# Altium PCB RFID_PCB.PcbDoc (part 1 of 2)
Units mm, origin at the board's own origin, x right, y up, seen from the top; angles counter-clockwise.
Board outline 160 x 100 mm, 2 copper layers (Top Layer, Bottom Layer); 207 components, 186 nets, 827 pads, 261 vias.
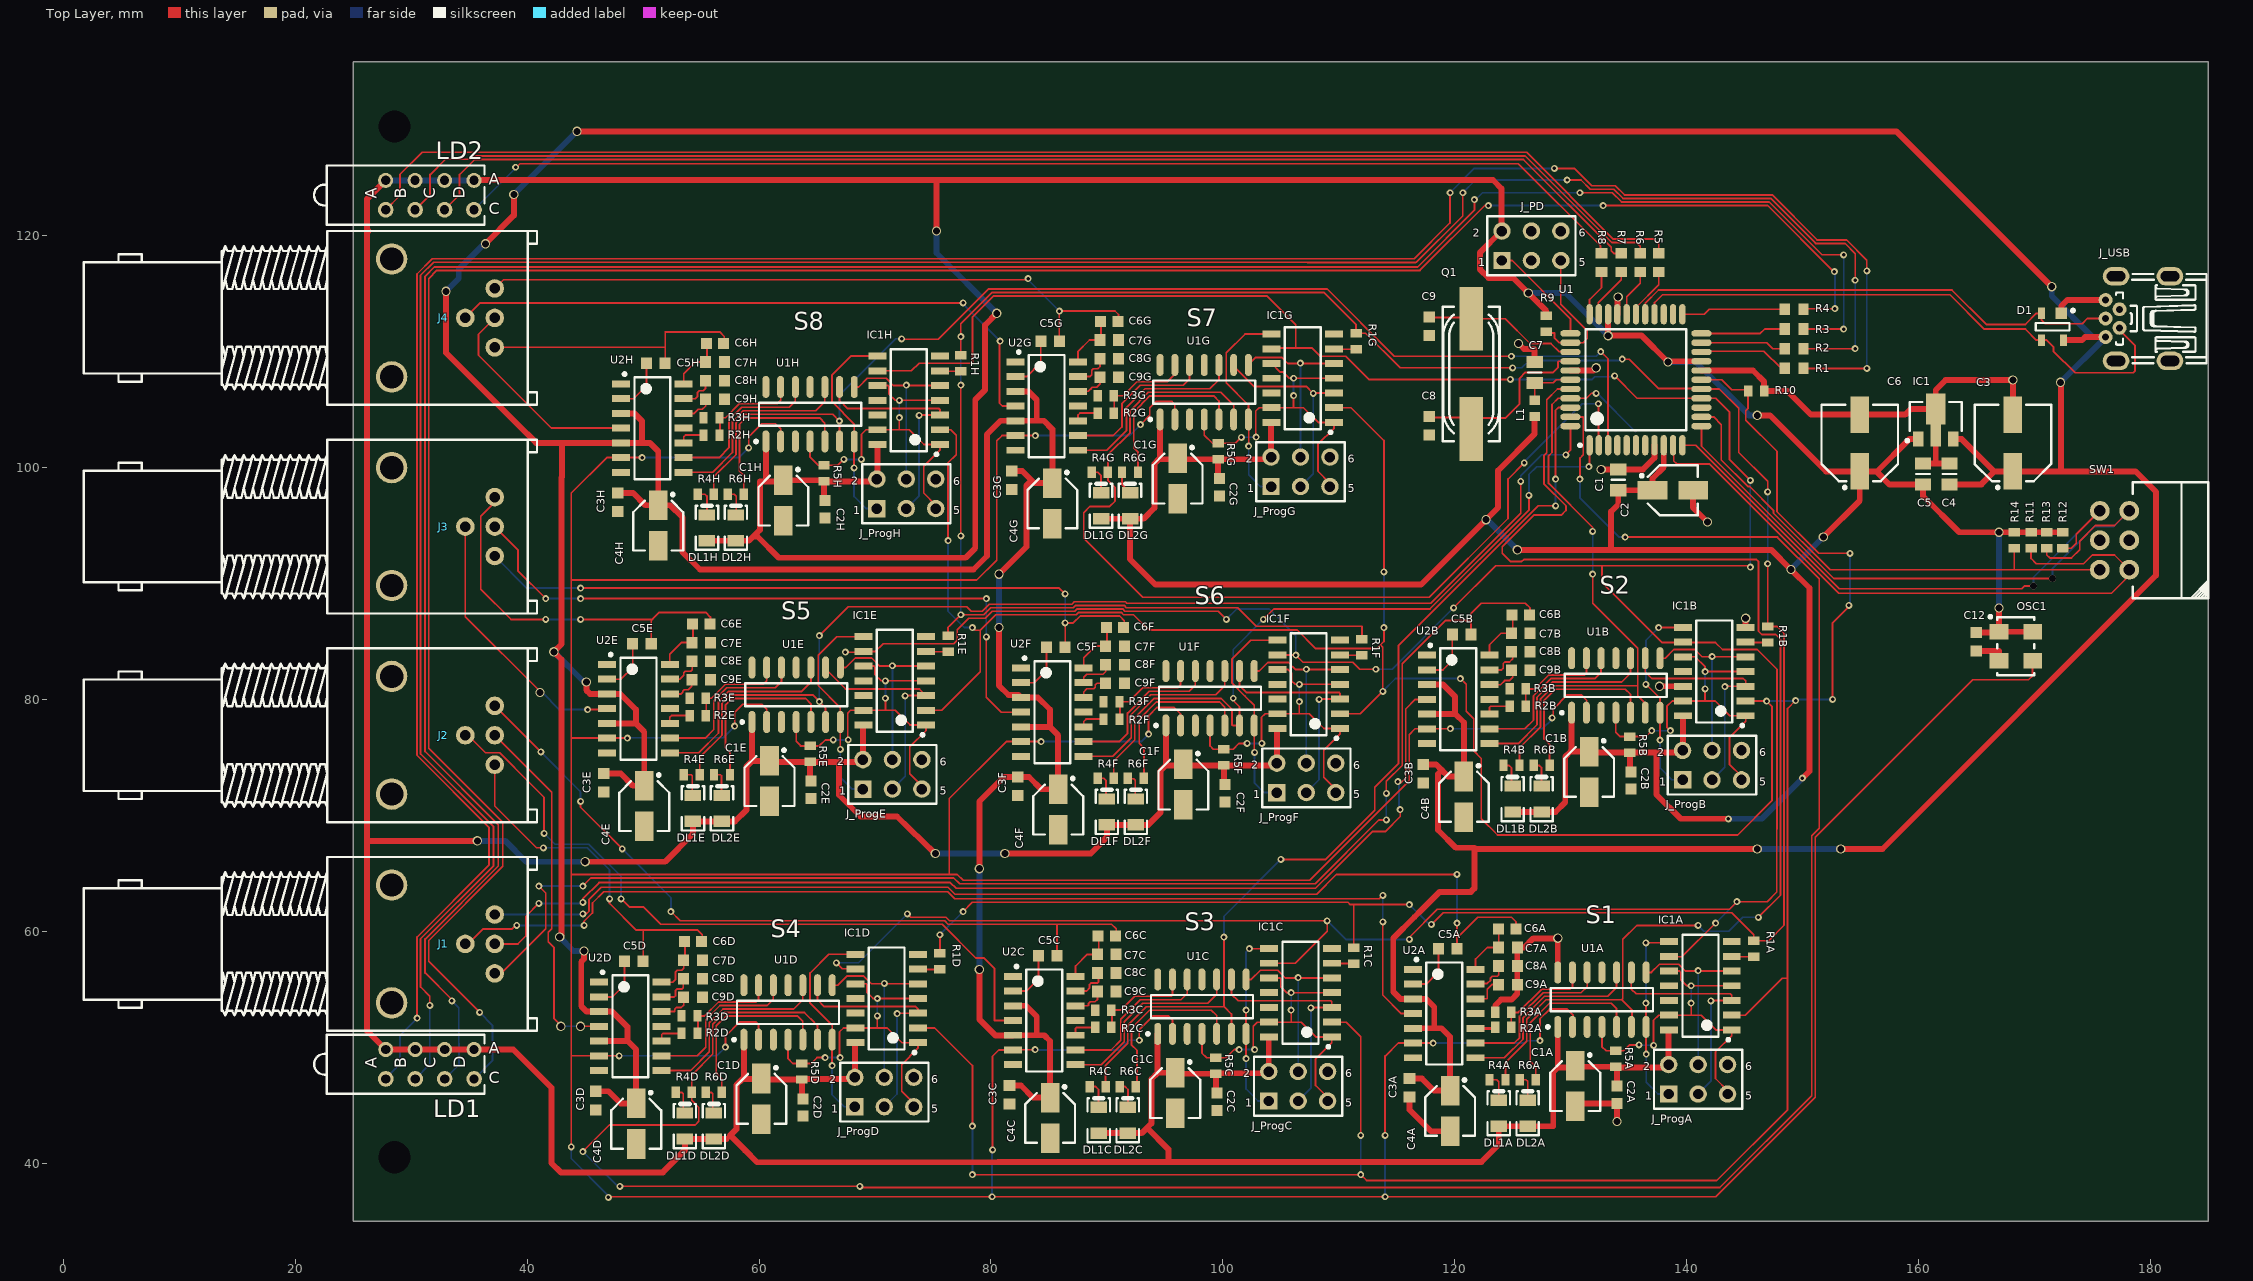
[diagram p0: Top Layer view]
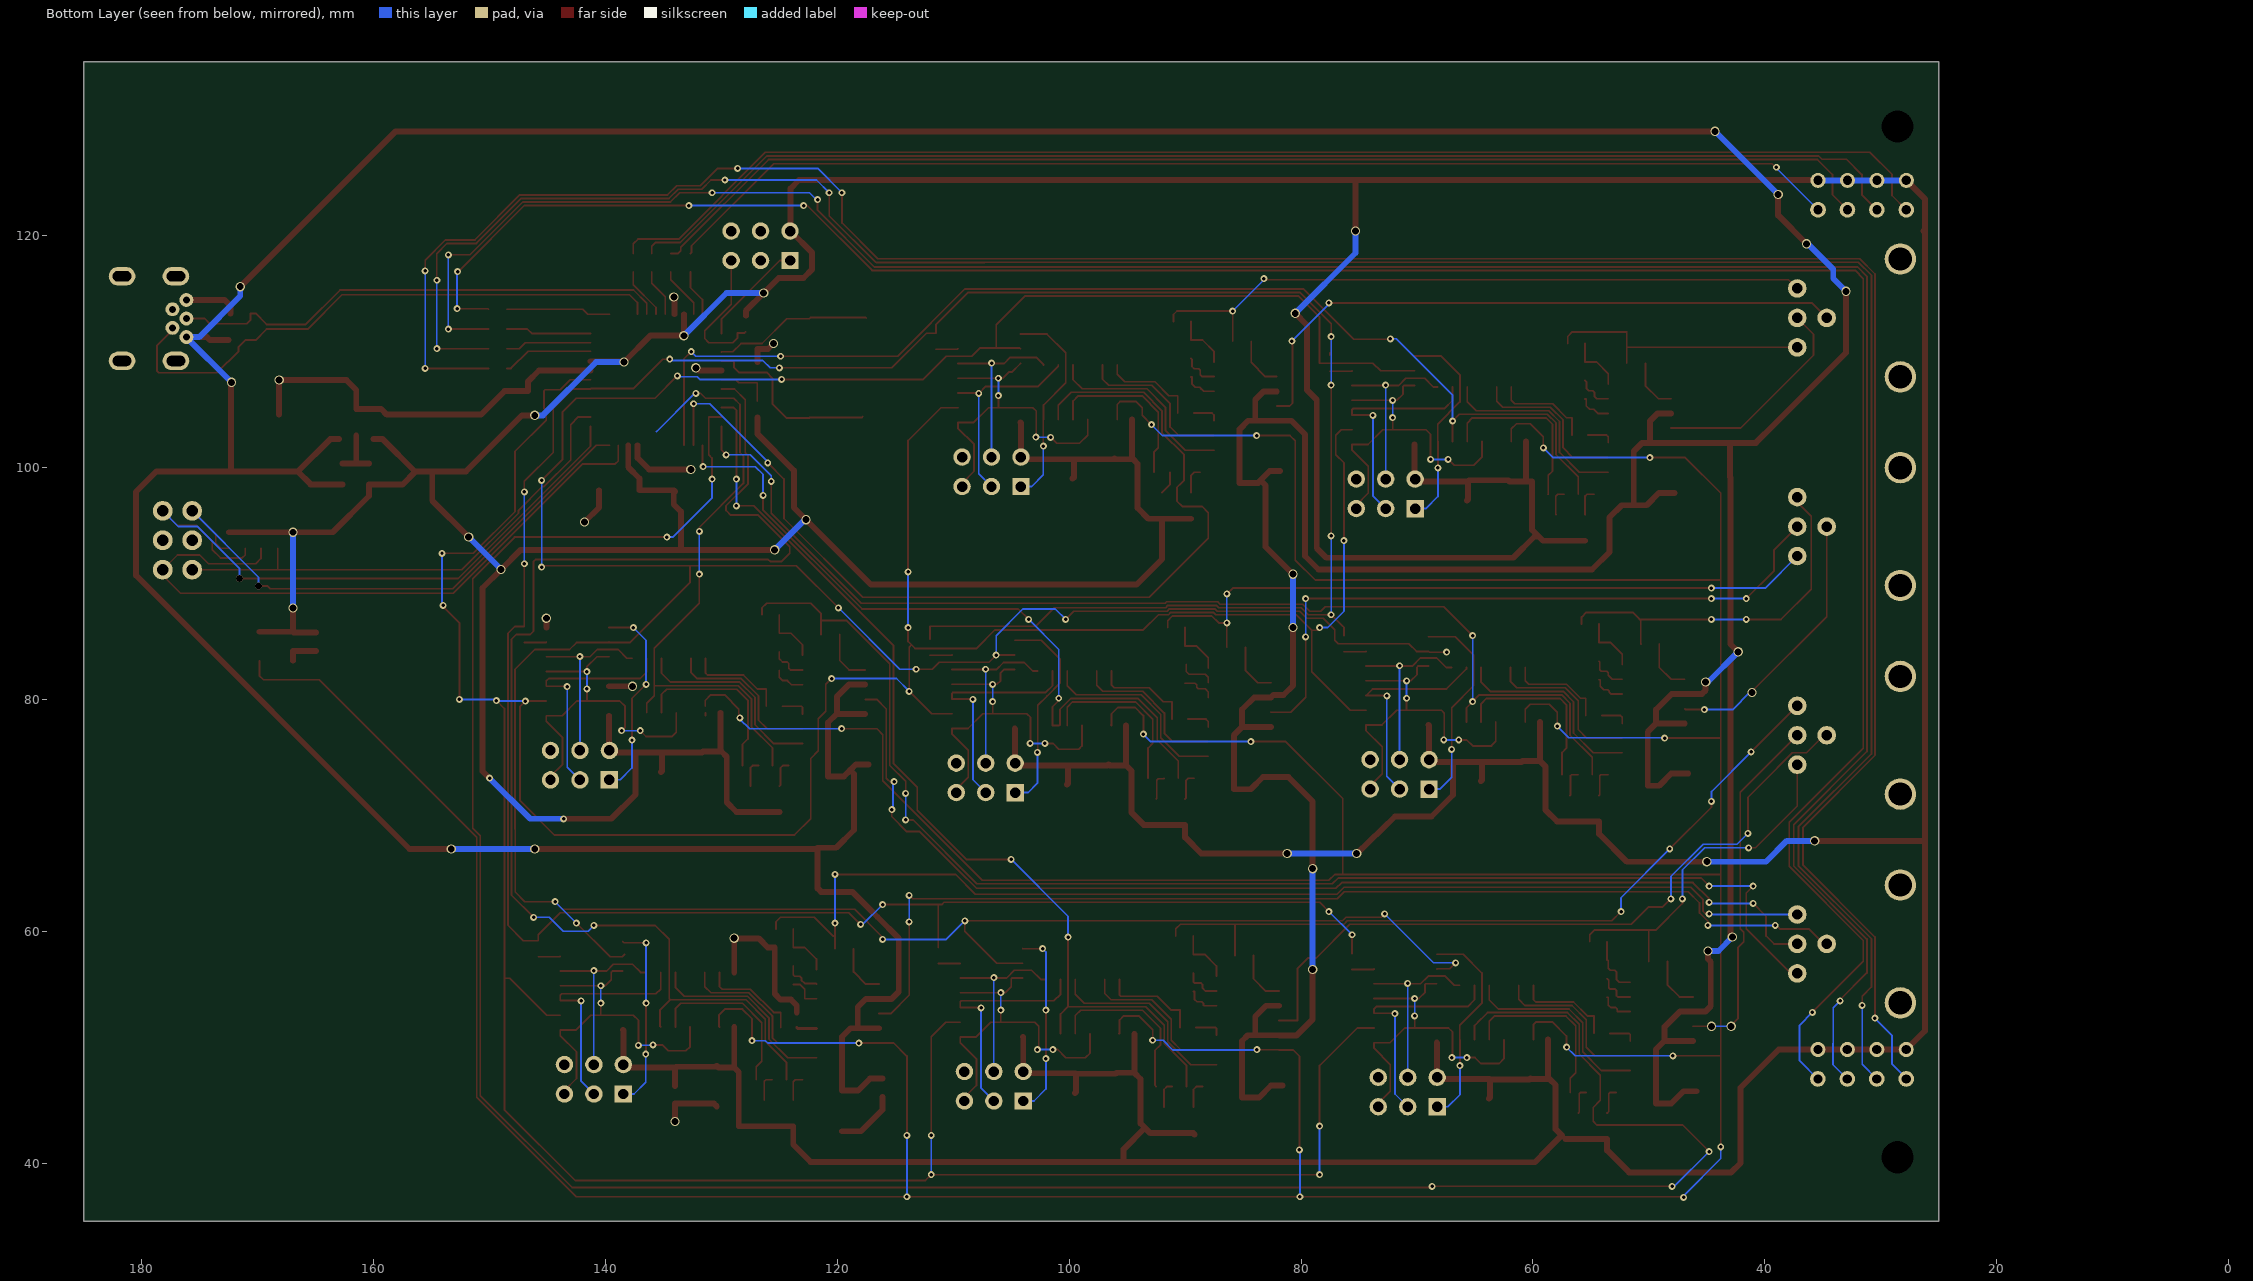
[diagram p1: Bottom Layer view, seen from below]
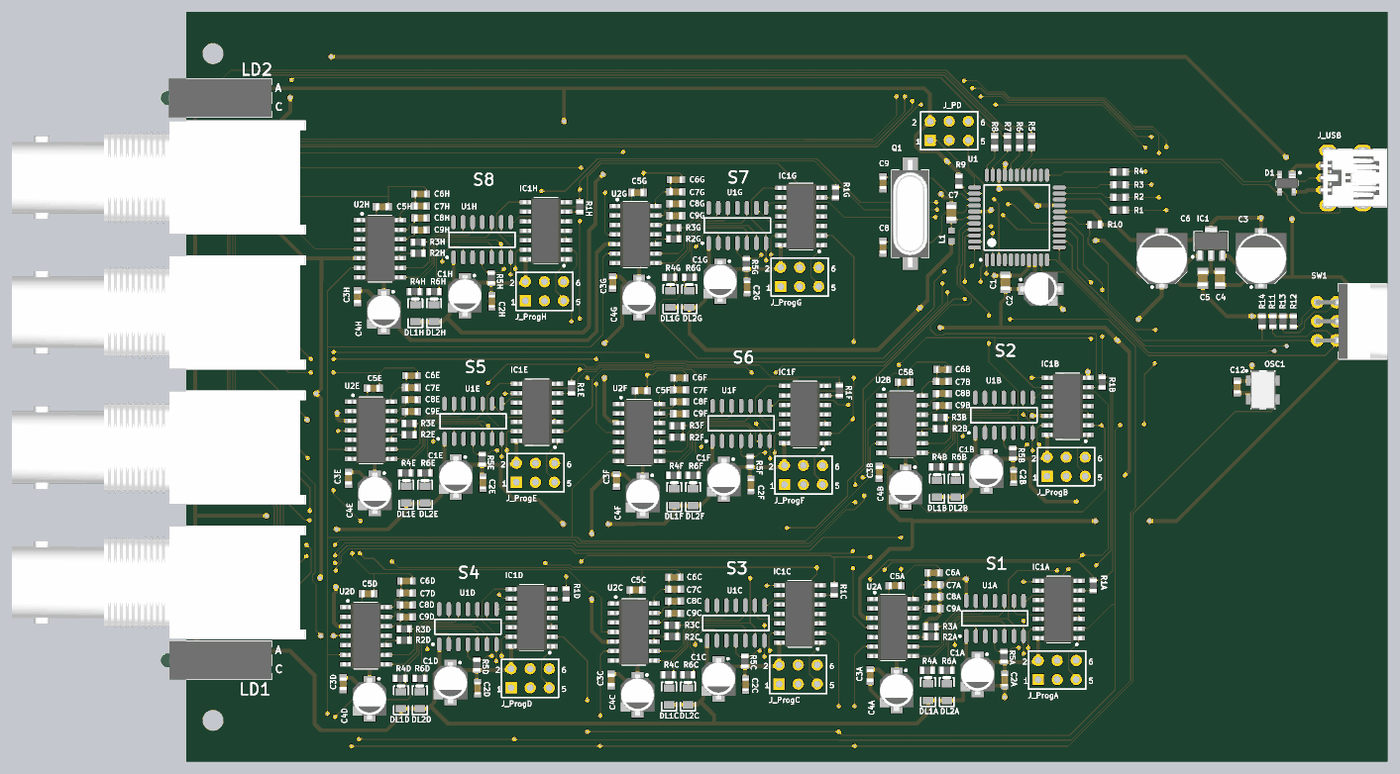
[diagram p3: 3D render of the assembled board from above, using the file's embedded part models]

## Layer stack, top to bottom
Top Solder: solder mask 0.0102, Solder Resist, Dk 3.5
Top Layer: signal copper 0.0356
Dielectric1: dielectric 0.32, FR-4, Dk 4.8
Bottom Layer: signal copper 0.0356
Bottom Solder: solder mask 0.0102, Solder Resist, Dk 3.5

## Board outline
25,35 185,35 185,135 25,135

## Design rules (kind name [scope] priority, off if disabled: settings)
Clearance Clearance_power [(InNet('P3V3') OR InNet('P5V0'))] p1: gap=0.508 ignorepadtopadclearanceinfootprint=FALSE except(0: Arc-Hole Track-Hole SMDPad-Hole THPad-Hole Via-Hole Fill-Hole Poly-Hole Region-Hole Text-Hole)
Clearance [NOT ((InNet('P3V3') OR InNet('P5V0')))] p2: gap=0.152 ignorepadtopadclearanceinfootprint=FALSE except(0: Arc-Hole Track-Hole SMDPad-Hole THPad-Hole Via-Hole Fill-Hole Poly-Hole Region-Hole Text-Hole)
DiffPairsRouting [All] p1: maxlimit=0.254 minlimit=0.254 mostfreqgap=0.254 toplayer_minwidth=0.381 toplayer_maxwidth=0.381 toplayer_prefwidth=0.381 bottomlayer_minwidth=0.381 bottomlayer_maxwidth=0.381 bottomlayer_prefwidth=0.381 maxuncoupledlength=12.7
Height [All] p1: minheight=0 maxheight=50 prefheight=12.7
HoleToHoleClearance [All] p1: gap=0.025 allowstackedmicrovias=TRUE
MinimumSolderMaskSliver [All] p1: minsoldermaskwidth=0
PolygonConnect [All] p1: connectstyle=Relief reliefconductorwidth=0.254 reliefentries=4 polygonreliefangle="90 Angle" airgapwidth=0.254
RoutingVias [All] p1: holewidth=0.3 width=0.6 viastyle="Through Hole" minholewidth=0 minwidth=0 maxholewidth=0.9 maxwidth=0.9
SilkToSilkClearance [All] p1: silktosilkclearance=0
SilkToSolderMaskClearance [IsPad] p1: minsilkscreentomaskgap=0 clearancetoexposedcopper=TRUE
SolderMaskExpansion [All] p1: expansion=0.102
Width Width_power [(InNet('P3V3') OR InNet('P5V0'))] p1: maxlimit=0.508 minlimit=0.508 preferedwidth=0.508
Width [All] p2: maxlimit=0.508 minlimit=0.127 preferedwidth=0.152
24 further rules are at their usual default settings.

## Classes and differential pairs
channel class Slave: S1 S2 S3 S4 S5 S6 S7 S8
component class S1: C1_S1 C2_S1 C3_S1 C4_S1 C5_S1 C7_S1 C8_S1 C9_S1 DL1_S1 DL2_S1 IC1_S1 J_Prog1_S1 R1_S1 R2_S1 R3_S1 R4_S1 R5_S1 R6_S1 U1_S1 U2_S1
component class S4: C1_S4 C2_S4 C3_S4 C4_S4 C5_S4 C6_S4 C7_S4 C8_S4 C9_S4 DL1_S4 DL2_S4 IC1_S4 J_Prog1_S4 R1_S4 R2_S4 R3_S4 R4_S4 R5_S4 R6_S4 U1_S4 U2_S4
component class Master: C12 D1 J2 J3 J? J_PD J_USB L1 LD1 LD2 OSC1 Q1 R7 R8 R9 R10 R11 R12 R13 R14 SW1
net class SS_BUS[1..8]: SS_BUS1 SS_BUS2 SS_BUS3 SS_BUS4 SS_BUS5 SS_BUS6 SS_BUS7 SS_BUS8
net class IN_N[1..8]: IN_N1 IN_N2 IN_N3 IN_N4 IN_N5 IN_N6 IN_N7 IN_N8
net class IN_P[1..8]: IN_P1 IN_P2 IN_P3 IN_P4 IN_P5 IN_P6 IN_P7 IN_P8
differential pair D: +D_P -D_N

## Components (designator, comment, footprint, x,y, rotation, side; value= is the part's Value field where it differs from the comment)
C1 "100nF" CAPC2012X135N 134.112,98.933 r270 top
C1A "22uF" CAPAE430X540N 130.4,46.65 r270 top (schematic designator C1)
C1B "22uF" CAPAE430X540N 131.6,73.75 r270 top (schematic designator C1)
C1C "22uF" CAPAE430X540N 95.9,46.05 r270 top (schematic designator C1)
C1D "22uF" CAPAE430X540N 60.2,45.55 r270 top (schematic designator C1)
C1E "22uF" CAPAE430X540N 60.9,72.95 r270 top (schematic designator C1)
C1F "22uF" CAPAE430X540N 96.6,72.65 r270 top (schematic designator C1)
C1G "22uF" CAPAE430X540N 96.1,99.05 r270 top (schematic designator C1)
C1H "22uF" CAPAE430X540N 62.1,97.15 r270 top (schematic designator C1)
C2 "22uF" CAPAE430X540N 138.811,98.044 r0 top
C2A "100nF" CAPC1608X90N 134,45.9 r90 top (schematic designator C2)
C2B "100nF" CAPC1608X90N 135.2,73 r90 top (schematic designator C2)
C2C "100nF" CAPC1608X90N 99.5,45.3 r90 top (schematic designator C2)
C2D "100nF" CAPC1608X90N 63.8,44.8 r90 top (schematic designator C2)
C2E "100nF" CAPC1608X90N 64.5,72.2 r90 top (schematic designator C2)
C2F "100nF" CAPC1608X90N 100.2,71.9 r90 top (schematic designator C2)
C2G "100nF" CAPC1608X90N 99.7,98.3 r90 top (schematic designator C2)
C2H "100nF" CAPC1608X90N 65.7,96.4 r90 top (schematic designator C2)
C3 "100uF" CAPAE660X540N 168.148,102.108 r90 top
C3A "100nF" CAPC1608X87N 116.1,46.5 r90 top (schematic designator C3)
C3B "100nF" CAPC1608X87N 117.3,73.6 r90 top (schematic designator C3)
C3C "100nF" CAPC1608X87N 81.6,45.9 r90 top (schematic designator C3)
C3D "100nF" CAPC1608X87N 45.9,45.4 r90 top (schematic designator C3)
C3E "100nF" CAPC1608X87N 46.6,72.8 r90 top (schematic designator C3)
C3F "100nF" CAPC1608X87N 82.3,72.5 r90 top (schematic designator C3)
C3G "100nF" CAPC1608X87N 81.8,98.9 r90 top (schematic designator C3)
C3H "100nF" CAPC1608X87N 47.8,97 r90 top (schematic designator C3)
C4 "330nF" CAPC2012X135N 162.687,99.441 r90 top
C4A "22uF" CAPAE430X540N 119.6,44.5 r270 top (schematic designator C4)
C4B "22uF" CAPAE430X540N 120.8,71.6 r270 top (schematic designator C4)
C4C "22uF" CAPAE430X540N 85.1,43.9 r270 top (schematic designator C4)
C4D "22uF" CAPAE430X540N 49.4,43.4 r270 top (schematic designator C4)
C4E "22uF" CAPAE430X540N 50.1,70.8 r270 top (schematic designator C4)
C4F "22uF" CAPAE430X540N 85.8,70.5 r270 top (schematic designator C4)
C4G "22uF" CAPAE430X540N 85.3,96.9 r270 top (schematic designator C4)
C4H "22uF" CAPAE430X540N 51.3,95 r270 top (schematic designator C4)
C5 "100nF" CAPC2012X135N 160.401,99.441 r90 top
C5A "10nF" CAPC1608X87N 119.4,58.5 r180 top (schematic designator C5)
C5B "10nF" CAPC1608X87N 120.6,85.6 r180 top (schematic designator C5)
C5C "10nF" CAPC1608X87N 84.9,57.9 r180 top (schematic designator C5)
C5D "10nF" CAPC1608X87N 49.2,57.4 r180 top (schematic designator C5)
C5E "10nF" CAPC1608X87N 49.9,84.8 r180 top (schematic designator C5)
C5F "10nF" CAPC1608X87N 85.6,84.5 r180 top (schematic designator C5)
C5G "10nF" CAPC1608X87N 85.1,110.9 r180 top (schematic designator C5)
C5H "10nF" CAPC1608X87N 51.1,109 r180 top (schematic designator C5)
C6 "100uF" CAPAE660X540N 154.94,102.108 r90 top
C6A "100pF" CAPC1608X90N 124.55,60.2 r0 top (schematic designator C6)
C6B "100pF" CAPC1608X90N 125.7,87.3 r0 top (schematic designator C6)
C6C "100pF" CAPC1608X90N 90,59.6 r0 top (schematic designator C6)
C6D "100pF" CAPC1608X90N 54.3,59.1 r0 top (schematic designator C6)
C6E "100pF" CAPC1608X90N 55,86.5 r0 top (schematic designator C6)
C6F "100pF" CAPC1608X90N 90.7,86.2 r0 top (schematic designator C6)
C6G "100pF" CAPC1608X90N 90.2,112.6 r0 top (schematic designator C6)
C6H "100pF" CAPC1608X90N 56.2,110.7 r0 top (schematic designator C6)
C7 "100nF" CAPC2012X135N 126.9,108.204 r270 top
C7A "1nF" CAPC1608X87N 124.6,58.6 r180 top (schematic designator C7)
C7B "1nF" CAPC1608X87N 125.7,85.7 r180 top (schematic designator C7)
C7C "1nF" CAPC1608X87N 90,58 r180 top (schematic designator C7)
C7D "1nF" CAPC1608X87N 54.3,57.5 r180 top (schematic designator C7)
C7E "1nF" CAPC1608X87N 55,84.9 r180 top (schematic designator C7)
C7F "1nF" CAPC1608X87N 90.7,84.6 r180 top (schematic designator C7)
C7G "1nF" CAPC1608X87N 90.2,111 r180 top (schematic designator C7)
C7H "1nF" CAPC1608X87N 56.2,109.1 r180 top (schematic designator C7)
C8 "10pF" CAPC1608X87N 117.8,103.6 r90 top
C8A "100nF" CAPC1608X87N 124.6,57 r180 top (schematic designator C8)
C8B "100nF" CAPC1608X87N 125.7,84.1 r180 top (schematic designator C8)
C8C "100nF" CAPC1608X87N 90,56.4 r180 top (schematic designator C8)
C8D "100nF" CAPC1608X87N 54.3,55.9 r180 top (schematic designator C8)
C8E "100nF" CAPC1608X87N 55,83.3 r180 top (schematic designator C8)
C8F "100nF" CAPC1608X87N 90.7,83 r180 top (schematic designator C8)
C8G "100nF" CAPC1608X87N 90.2,109.4 r180 top (schematic designator C8)
C8H "100nF" CAPC1608X87N 56.2,107.5 r180 top (schematic designator C8)
C9 "10pF" CAPC1608X87N 117.8,112.2 r90 top
C9A "100nF" CAPC1608X87N 124.6,55.4 r180 top (schematic designator C9)
C9B "100nF" CAPC1608X87N 125.7,82.5 r180 top (schematic designator C9)
C9C "100nF" CAPC1608X87N 90,54.8 r180 top (schematic designator C9)
C9D "100nF" CAPC1608X87N 54.3,54.3 r180 top (schematic designator C9)
C9E "100nF" CAPC1608X87N 55,81.7 r180 top (schematic designator C9)
C9F "100nF" CAPC1608X87N 90.7,81.4 r180 top (schematic designator C9)
C9G "100nF" CAPC1608X87N 90.2,107.8 r180 top (schematic designator C9)
C9H "100nF" CAPC1608X87N 56.2,105.9 r180 top (schematic designator C9)
C12 "10pF" CAPC1608X87N 164.973,84.963 r90 top
D1 "PRTR5V0U2X" SOT190P230X110-4N 171.577,112.141 r270 top
DL1A "" 0805_LED 123.8,44.3 r270 top (schematic designator DL1)
DL1B "" 0805_LED 125,71.4 r270 top (schematic designator DL1)
DL1C "" 0805_LED 89.3,43.7 r270 top (schematic designator DL1)
DL1D "" 0805_LED 53.6,43.2 r270 top (schematic designator DL1)
DL1E "" 0805_LED 54.3,70.6 r270 top (schematic designator DL1)
DL1F "" 0805_LED 90,70.3 r270 top (schematic designator DL1)
DL1G "" 0805_LED 89.5,96.7 r270 top (schematic designator DL1)
DL1H "" 0805_LED 55.5,94.8 r270 top (schematic designator DL1)
DL2A "" 0805_LED 126.3,44.3 r270 top (schematic designator DL2)
DL2B "" 0805_LED 127.5,71.4 r270 top (schematic designator DL2)
DL2C "" 0805_LED 91.8,43.7 r270 top (schematic designator DL2)
DL2D "" 0805_LED 56.1,43.2 r270 top (schematic designator DL2)
DL2E "" 0805_LED 56.8,70.6 r270 top (schematic designator DL2)
DL2F "" 0805_LED 92.5,70.3 r270 top (schematic designator DL2)
DL2G "" 0805_LED 92,96.7 r270 top (schematic designator DL2)
DL2H "" 0805_LED 58,94.8 r270 top (schematic designator DL2)
IC1 "L78L33ACUTR" SOT89 161.494,104.416 r90 top
IC1A "74LVC126A" SOIC127P600X175-14N 141.2,55.3 r180 top (schematic designator IC1)
IC1B "74LVC126A" SOIC127P600X175-14N 142.4,82.4 r180 top (schematic designator IC1)
IC1C "74LVC126A" SOIC127P600X175-14N 106.7,54.7 r180 top (schematic designator IC1)
IC1D "74LVC126A" SOIC127P600X175-14N 71,54.2 r180 top (schematic designator IC1)
IC1E "74LVC126A" SOIC127P600X175-14N 71.7,81.6 r180 top (schematic designator IC1)
IC1F "74LVC126A" SOIC127P600X175-14N 107.4,81.3 r180 top (schematic designator IC1)
IC1G "74LVC126A" SOIC127P600X175-14N 106.9,107.7 r180 top (schematic designator IC1)
IC1H "74LVC126A" SOIC127P600X175-14N 72.9,105.8 r180 top (schematic designator IC1)
J1 "Family" RENHOTEC_RHT-610-0049 31,58.906 r180 top
J2 "Family" RENHOTEC_RHT-610-0049 31,76.906 r180 top
J3 "Family" RENHOTEC_RHT-610-0049 31,94.906 r180 top
J4 "Family" RENHOTEC_RHT-610-0049 31,112.906 r180 top
J_PD "" HDR2X3 124.079,117.856 r0 top
J_ProgA "" HDR2X3 138.46,45.96 r0 top (schematic designator J_Prog1)
J_ProgB "" HDR2X3 139.66,73.06 r0 top (schematic designator J_Prog1)
J_ProgC "" HDR2X3 103.96,45.36 r0 top (schematic designator J_Prog1)
J_ProgD "" HDR2X3 68.26,44.86 r0 top (schematic designator J_Prog1)
J_ProgE "" HDR2X3 68.961,72.263 r0 top (schematic designator J_Prog1)
J_ProgF "" HDR2X3 104.66,71.96 r0 top (schematic designator J_Prog1)
J_ProgG "" HDR2X3 104.16,98.36 r0 top (schematic designator J_Prog1)
J_ProgH "" HDR2X3 70.16,96.46 r0 top (schematic designator J_Prog1)
J_USB "USB" WURTH_651005136521 176.15,112.85 r90 top
L1 "0.5R" 1608[0603] 126.9,105.1 r270 top
LD1 "Green" LED_BIVAR_H485CGDL 31.61,48.53 r0 top
LD2 "Green" LED_BIVAR_H485CGDL 31.6,123.5 r0 top
OSC1 "Value" OSCSC250P320X500X130-4N 168.402,84.582 r0 top
Q1 "16MHz" XTAL1160X490X430 121.428,108.077 r90 top
R1 "510" RESC1608X55N 149.289,108.547 r180 top
R1A "100" RESC1608X50N 145.8,58.5 r270 top (schematic designator R1)
R1B "100" RESC1608X50N 147,85.6 r270 top (schematic designator R1)
R1C "100" RESC1608X50N 111.3,57.9 r270 top (schematic designator R1)
R1D "100" RESC1608X50N 75.6,57.4 r270 top (schematic designator R1)
R1E "100" RESC1608X50N 76.3,84.8 r270 top (schematic designator R1)
R1F "100" RESC1608X50N 112,84.5 r270 top (schematic designator R1)
R1G "100" RESC1608X50N 111.5,110.9 r270 top (schematic designator R1)
R1H "100" RESC1608X50N 77.4,109 r270 top (schematic designator R1)
R2 "510" RESC1608X55N 149.289,110.247 r180 top
R2A "10k" RESC1608X50N 124.19,51.7 r0 top (schematic designator R2)
R2B "10k" RESC1608X50N 125.45,79.4 r0 top (schematic designator R2)
R2C "10k" RESC1608X50N 89.7,51.7 r0 top (schematic designator R2)
R2D "10k" RESC1608X50N 54,51.2 r0 top (schematic designator R2)
R2E "10k" RESC1608X50N 54.7,78.6 r0 top (schematic designator R2)
R2F "10k" RESC1608X50N 90.4,78.3 r0 top (schematic designator R2)
R2G "10k" RESC1608X50N 89.9,104.7 r0 top (schematic designator R2)
R2H "10k" RESC1608X50N 55.9,102.8 r0 top (schematic designator R2)
R3 "510" RESC1608X55N 149.289,111.947 r180 top
R3A "15k" RESC1608X50N 124.19,53 r180 top (schematic designator R3)
R3B "15k" RESC1608X50N 125.45,80.9 r180 top (schematic designator R3)
R3C "15k" RESC1608X50N 89.7,53.2 r180 top (schematic designator R3)
R3D "15k" RESC1608X50N 54,52.7 r180 top (schematic designator R3)
R3E "15k" RESC1608X50N 54.7,80.1 r180 top (schematic designator R3)
R3F "15k" RESC1608X50N 90.4,79.8 r180 top (schematic designator R3)
R3G "15k" RESC1608X50N 89.9,106.2 r180 top (schematic designator R3)
R3H "15k" RESC1608X50N 55.9,104.3 r180 top (schematic designator R3)
R4 "510" RESC1608X55N 149.289,113.647 r180 top
R4A "1k" RESC1608X50N 123.7,47.2 r180 top (schematic designator R4)
R4B "1k" RESC1608X50N 124.9,74.3 r180 top (schematic designator R4)
R4C "1k" RESC1608X50N 89.2,46.6 r180 top (schematic designator R4)
R4D "1k" RESC1608X50N 53.5,46.1 r180 top (schematic designator R4)
R4E "1k" RESC1608X50N 54.2,73.5 r180 top (schematic designator R4)
R4F "1k" RESC1608X50N 89.9,73.2 r180 top (schematic designator R4)
R4G "1k" RESC1608X50N 89.4,99.6 r180 top (schematic designator R4)
R4H "1k" RESC1608X50N 55.4,97.7 r180 top (schematic designator R4)
R5 "510" RESC1608X55N 137.6,117.666 r270 top
R5A "10k" RESC1608X50N 133.9,49 r270 top (schematic designator R5)
R5B "10k" RESC1608X50N 135.1,76.1 r270 top (schematic designator R5)
R5C "10k" RESC1608X50N 99.4,48.4 r270 top (schematic designator R5)
R5D "10k" RESC1608X50N 63.7,47.9 r270 top (schematic designator R5)
R5E "10k" RESC1608X50N 64.4,75.3 r270 top (schematic designator R5)
R5F "10k" RESC1608X50N 100.1,75 r270 top (schematic designator R5)
R5G "10k" RESC1608X50N 99.6,101.4 r270 top (schematic designator R5)
R5H "10k" RESC1608X50N 65.6,99.5 r270 top (schematic designator R5)
R6 "510" RESC1608X55N 136,117.666 r270 top
R6A "1k" RESC1608X50N 126.3,47.2 r180 top (schematic designator R6)
R6B "1k" RESC1608X50N 127.5,74.3 r180 top (schematic designator R6)
R6C "1k" RESC1608X50N 91.8,46.6 r180 top (schematic designator R6)
R6D "1k" RESC1608X50N 56.1,46.1 r180 top (schematic designator R6)
R6E "1k" RESC1608X50N 56.8,73.5 r180 top (schematic designator R6)
R6F "1k" RESC1608X50N 92.5,73.2 r180 top (schematic designator R6)
R6G "1k" RESC1608X50N 92,99.6 r180 top (schematic designator R6)
R6H "1k" RESC1608X50N 58,97.7 r180 top (schematic designator R6)
R7 "510" RESC1608X55N 134.364,117.666 r270 top
R8 "510" RESC1608X55N 132.664,117.666 r270 top
R9 "10k" RESC1608X50N 127.9,112.4 r90 top
R10 "10k" RESC1608X50N 146,106.6 r180 top
R11 "10k" RESC1608X50N 169.714,93.726 r90 top
R12 "10k" RESC1608X50N 172.466,93.726 r90 top
R13 "10k" RESC1608X50N 171.069,93.726 r90 top
R14 "10k" RESC1608X50N 168.275,93.726 r90 top
SW1 "HEX" SW_APEM_PT65106L254 181.737,93.726 r180 top
U1 "ATxmega16A4U-AU" 44A_N 135.636,107.569 r90 top
U1A "" 14S1_L 132.7,54.1 r90 top (schematic designator U1)
U1B "" 14S1_L 133.9,81.2 r90 top (schematic designator U1)
U1C "" 14S1_L 98.2,53.5 r90 top (schematic designator U1)
U1D "" 14S1_L 62.5,53 r90 top (schematic designator U1)
U1E "" 14S1_L 63.2,80.4 r90 top (schematic designator U1)
U1F "" 14S1_L 98.9,80.1 r90 top (schematic designator U1)
U1G "" 14S1_L 98.4,106.5 r90 top (schematic designator U1)
U1H "" 14S1_L 64.4,104.6 r90 top (schematic designator U1)
U2A "HTRC110" SOIC127P600X175-14N 119.1,52.9 r0 top (schematic designator U2)
U2B "HTRC110" SOIC127P600X175-14N 120.3,80 r0 top (schematic designator U2)
U2C "HTRC110" SOIC127P600X175-14N 84.6,52.3 r0 top (schematic designator U2)
U2D "HTRC110" SOIC127P600X175-14N 48.9,51.8 r0 top (schematic designator U2)
U2E "HTRC110" SOIC127P600X175-14N 49.6,79.2 r0 top (schematic designator U2)
U2F "HTRC110" SOIC127P600X175-14N 85.3,78.9 r0 top (schematic designator U2)
U2G "HTRC110" SOIC127P600X175-14N 84.8,105.3 r0 top (schematic designator U2)
U2H "HTRC110" SOIC127P600X175-14N 50.8,103.4 r0 top (schematic designator U2)

## Footprints (in the part's own frame and the unit in brackets; to place one, negate y for a bottom-side part, rotate by r counter-clockwise, add the part's x,y. Pads: shape width x height; smd on the part's side, far side on the other; paste and mask are expansions set on the pad)
14S1_L [mm] "SOIC, 14-Leads, Body 8.7x3.9mm, Pitch 1.27mm, IPC High Density"
  oval 1.9x0.6 smd: 1(-2.35,3.81) 2(-2.35,2.54) 3(-2.35,1.27) 4(-2.35,0) 5(-2.35,-1.27) 6(-2.35,-2.54) 7(-2.35,-3.81) 8(2.35,-3.81) 9(2.35,-2.54) 10(2.35,-1.27) 11(2.35,0) 12(2.35,1.27) 13(2.35,2.54) 14(2.35,3.81)
  silkscreen extent -2.47,-4.4 1,4.78, body extent -2,-4.38 2,4.38, height 1.75
44A_N [mm] "Thin QFP, 44-Leads, Body 10x10mm, Pitch 0.8mm, IPC Medium Density"
  oval 1.75x0.55 smd: 1(-5.65,4) 2(-5.65,3.2) 3(-5.65,2.4) 4(-5.65,1.6) 5(-5.65,0.8) 6(-5.65,0) 7(-5.65,-0.8) 8(-5.65,-1.6) 9(-5.65,-2.4) 10(-5.65,-3.2) 11(-5.65,-4) 23(5.65,-4) 24(5.65,-3.2) 25(5.65,-2.4) 26(5.65,-1.6) 27(5.65,-0.8) 28(5.65,0) 29(5.65,0.8) 30(5.65,1.6) 31(5.65,2.4) 32(5.65,3.2) 33(5.65,4)
  oval 0.55x1.75 smd: 12(-4,-5.65) 13(-3.2,-5.65) 14(-2.4,-5.65) 15(-1.6,-5.65) 16(-0.8,-5.65) 17(0,-5.65) 18(0.8,-5.65) 19(1.6,-5.65) 20(2.4,-5.65) 21(3.2,-5.65) 22(4,-5.65) 34(4,5.65) 35(3.2,5.65) 36(2.4,5.65) 37(1.6,5.65) 38(0.8,5.65) 39(0,5.65) 40(-0.8,5.65) 41(-1.6,5.65) 42(-2.4,5.65) 43(-3.2,5.65) 44(-4,5.65)
  silkscreen extent -5.77,-4.35 4.35,4.95, body extent -5,-5 5,5, height 1.2
0805_LED [mm]
  rect 0.965x1.422 smd: A(1.118,0) K(-1.118,0)
  silkscreen extent -1.91,-0.97 1.91,0.97, body extent -1,-0.63 1,0.63, height 0.9
1608[0603] [mm] "Chip Capacitor, Body 1.6x0.8mm, IPC High Density"
  rect 0.8x0.9 smd: 1(-0.7,0) 2(0.7,0)
  body extent -0.87,-0.48 0.87,0.48, height 1.3
CAPAE430X540N [mm] "Capacitor, Aluminium Electrolytric, 4.3mm L X 4.3mm W X 5.4mm H, IPC Medium Density"
  rect 2.55x1.6 smd: 1(-1.75,0) 2(1.75,0)
  silkscreen extent -2.8,-2.15 2.15,2.15, body extent -2.75,-2.25 2.75,2.25, height 5.7
CAPAE660X540N [mm] "Capacitor, Aluminium Electrolytric, 6.6mm L X 6.6mm W X 5.4mm H, IPC Medium Density"
  rect 3.15x1.6 smd: 1(-2.45,0) 2(2.45,0)
  silkscreen extent -3.95,-3.3 3.3,3.3, body extent -3.9,-3.4 3.9,3.4, height 5.7
CAPC1608X87N [mm] "Chip Capacitor, Body 1.6x0.8mm IPC Medium Density"
  rect 0.95x1 smd: 1(-0.8,0) 2(0.8,0)
  body extent -0.87,-0.47 0.88,0.48, height 0.87
CAPC1608X90N [mm] "Chip Capacitor, Body 1.6x0.8mm IPC Medium Density"
  rect 0.95x0.95 smd: 1(-0.75,0) 2(0.75,0)
  body extent -0.85,-0.45 0.85,0.45, height 0.9
CAPC2012X135N [mm] "Chip Capacitor, Body 2.0x1.25mm, IPC Medium Density"
  rect 1.05x1.4 smd: 1(-0.9,0) 2(0.9,0)
  silkscreen extent 0,-0.58 0,0.58, body extent -1.05,-0.67 1.05,0.68, height 1.25
HDR2X3 [mm] "Connector; Header; 3x2 Position"
  rect 1.5x1.5 hole 0.9: 1(0,0)
  round 1.5 hole 0.9: 2(0,2.54) 3(2.54,0) 4(2.54,2.54) 5(5.08,0) 6(5.08,2.54)
  silkscreen extent -1.27,-1.27 6.35,3.81
LED_BIVAR_H485CGDL [mm] "Quad-Level 2mm Green, PCB Edge Mounting  BIVAR H485CGDL"
  round 1.35 hole 0.8: 1(-3.81,-1.27) 3(-1.27,-1.27) 5(1.27,-1.27) 7(3.81,-1.27)
  round 1.3 hole 0.8: 2(-3.81,1.27) 4(-1.27,1.27) 6(1.27,1.27) 8(3.81,1.27)
  silkscreen extent -9.99,-2.55 4.71,2.55, body extent -9.99,-2.55 4.71,2.55, height 11.3
OSCSC250P320X500X130-4N [mm] "Oscillator, Side Concave; 2.54mm Pitch; 4 pin, 3.20mm L X 5.00mm W X 1.30mm H, IPC Medium Density"
  rect 1.6x1.35 smd: 1(-1.45,1.25) 2(-1.45,-1.25) 3(1.45,-1.25) 4(1.45,1.25)
  silkscreen extent -2.32,-2.5 1.6,2.67, body extent -1.7,-2.6 1.7,2.6, height 1.3
RENHOTEC_RHT-610-0049 [mm] "Dual Right Angle 50 Ohm BNC Jack, White Valox Case"
  round 1.6 hole 0.9: 1(-6.2,-2.54) 2(-6.2,0) 3(-6.2,2.54) 4(-3.66,0)
  round 2.7 hole 2: 6(2.69,-5.08) 7(2.69,5.08)
  silkscreen extent -9.85,-7.5 29.25,7.5, body extent -9.85,-7.5 29.25,7.5, height 29.3
RESC1608X50N [mm] "Chip Resistor, EIA 0603, Metric 1608, Body 1.6x0.8mm, IPC Medium Density"
  rect 0.72x0.99 smd: 1(-0.69,0) 2(0.69,0)
  body extent -0.87,-0.47 0.88,0.48, height 0.5
RESC1608X55N [mm] "Chip Resistor, EIA 0603, Metric 1608, Body 1.6x0.8mm, IPC Medium Density"
  rect 0.9x1 smd: 1(-0.8,0) 2(0.8,0)
  body extent -0.87,-0.47 0.88,0.48, height 0.55
SOIC127P600X175-14N [mm] "SOIC 14, Pitch 1.27mm - Body 4x8.75mm, IPC Medium Density"
  rect 1.55x0.6 smd: 1(-2.7,3.81) 2(-2.7,2.54) 3(-2.7,1.27) 4(-2.7,0) 5(-2.7,-1.27) 6(-2.7,-2.54) 7(-2.7,-3.81) 8(2.7,-3.81) 9(2.7,-2.54) 10(2.7,-1.27) 11(2.7,0) 12(2.7,1.27) 13(2.7,2.54) 14(2.7,3.81)
  silkscreen extent -2.53,-4.4 1.55,4.78, body extent -3.1,-4.37 3.1,4.38, height 1.75
SOT89 [mm] "SOT89-3, 3-Leads, Body 2.48x4.5mm"
  rect 1.3x0.9 smd: 1(-1.965,1.5) 3(-1.965,-1.5)
  rect 1.9x0.9 smd: 2(-1.665,0)
  rect 2.7x1.7 smd: 2(0.635,0)
  silkscreen extent -2.22,-2.25 1.24,2.57, body extent -2.44,-2.25 1.81,2.25, height 1.6
SOT190P230X110-4N [mm] "SOT143, SOT, 1.90mm Pitch; 4 Pin, 1.30mm W X 2.90mm L X 1.10mm H body, IPC Medium Density"
  rect 1x1 smd: 1(-1.15,0.75)
  rect 1x0.6 smd: 2(-1.15,-0.95) 3(1.15,-0.95) 4(1.15,0.95)
  silkscreen extent -1.52,-1.45 0.33,1.88, body extent -1.25,-1.5 1.25,1.5, height 1.1
SW_APEM_PT65106L254 [mm] "Body 10x10mm, Right Angled Rotary Hexadecimal Code Switch Whith Screwdriver Actuator, APEM PT65 (CR65) Series"
  round 1.7 hole 1: 1(3.55,2.54) 2(6.09,-2.54) 4(3.55,-2.54) 8(6.09,2.54) C1(3.55,0) C2(6.09,0)
  silkscreen extent -3.25,-5 3.25,5, body extent -3.25,-5 6.23,5, height 10
WURTH_651005136521 [mm] "Mini USB Type B Horizontal 5 Contacts"
  round 1.2 hole 0.6: 1(-1.6,0) 2(-0.8,-1.2) 3(0,0) 4(0.8,-1.2) 5(1.6,0)
  oval 1.6x2.3 hole 0.9 slot 1.6 at 90 deg: 6(-3.65,-5.55) 6(-3.65,-0.9) 6(3.65,-5.55) 6(3.65,-0.9)
  silkscreen extent -3.85,-8.7 3.85,-0.9, body extent -4.07,-8.7 4.08,0.13, height 3.9
XTAL1160X490X430 [mm] "HC49/4H SMX Case, SMD Cristal, Body 11.6x4.9mm"
  rect 5.5x2 smd: 1(-4.75,0) 2(4.75,0)
  silkscreen extent -5.8,-2.45 5.8,2.45, body extent -7.15,-2.45 7.15,2.45, height 4.3

## Part data
C1 C5 C7: library part CC0805_100NF_50V_10%_X7R, "Non-polarised capacitor"
C1A C1B C1C C1D C1E C1F C1G C1H C2 C4A C4B C4C C4D C4E C4F C4G C4H: library part CAE430-540_22UF_10V_20%, "Polarised capacitor"
C2A C2B C2C C2D C2E C2F C2G C2H: library part CC0603_100NF_100V_10%_X7R, "Non-polarised capacitor"
C3 C6: library part CAE660-540_100UF_6.3V_20%, "Polarised capacitor"
C3A C3B C3C C3D C3E C3F C3G C3H C5A C5B C5C C5D C5E C5F C5G C5H C7A C7B C7C C7D C7E C7F C7G C7H C8A C8B C8C C8D C8E C8F C8G C8H C9A C9B C9C C9D C9E C9F C9G C9H: library part CC0603_10NF_50V_10%_X7R, "Non-polarised capacitor"
C4: library part CC0805_330NF_16V_10%_X7R, "Non-polarised capacitor"
C6A C6B C6C C6D C6E C6F C6G C6H: library part CC0603_100PF_250V_5%_ATC_600S, "Non-polarised capacitor"
C8 C9 C12: library part CC0603_10PF_50V_5%_NP0, "Non-polarised capacitor"
D1: "Ultra Low Capacitance Double Rail-to-Rail ESD Protection Diode"
DL1A DL1B DL1C DL1D DL1E DL1F DL1G DL1H DL2A DL2B DL2C DL2D DL2E DL2F DL2G DL2H: library part LED1, "Light Emitting Diode"
IC1: "3-Terminal Regulator 1=OUT 2=GND 3=IN"
IC1A IC1B IC1C IC1D IC1E IC1F IC1G IC1H: "Quadruple Bus Buffer with 3-State Outputs"
J1 J2 J3 J4: "Dual Right Angle 50 Ohm BNC Jack, White Valox Case"
J_PD J_ProgA J_ProgB J_ProgC J_ProgD J_ProgE J_ProgF J_ProgG J_ProgH: library part "Header 3X2", "Header, 3-Pin, Dual row"
J_USB: library part WURTH_651005136521, "5 Pin + 1 Shield USB Receptacle"
L1: library part IND_1UH_20%_BOURNS_SRP4020TA, "Ferrite Bead"
LD1 LD2: "LED x4 Green 1C2A-BOT_3C4A_5C6A_7C8A-TOP"
OSC1: library part "Oscillator 1E 2GND 3OUT 4VDD", "Oscillator 4 pins 1=E/D 2=GND 3=OUT 4=VDD"
Q1: library part XTAL_16MHZ_IQD_LFXTAL003237, "Quartz Crystal"
R1 R2 R3 R4 R5 R6 R7 R8: library part R0603_510R_1%_0.1W_100PPM, "Resistor - 1%"
R1A R1B R1C R1D R1E R1F R1G R1H: library part R0603_100R_1%_0.1W_100PPM, "Resistor - 1%"
R2A R2B R2C R2D R2E R2F R2G R2H: library part R0603_10K_1%_0.1W_100PPM, "Resistor - 1%"
R3A R3B R3C R3D R3E R3F R3G R3H: library part R0603_15K_1%_0.1W_100PPM, "Resistor - 1%"
R4A R4B R4C R4D R4E R4F R4G R4H R5A R5B R5C R5D R5E R5F R5G R5H R6A R6B R6C R6D R6E R6F R6G R6H R9 R10 R11 R12 R13 R14: library part R0805_1K_1%_0.33W_100PPM_VISHAY_CRCW-HP, "Resistor - 1%"
SW1: library part SW_APEM_PT65106L254, "Rotary Code Switch 1 2 4 8 C1 C2"
U1: library part ATxmega16A4-AU, "8/16-bit AVR XMEGA A4 Microcontroller, 1.6-3.6V, 16KB + 4KB Flash, 1KB EEPROM, 2KB SRAM, 44-pin TQFP, Industrial Grade (-40°C to 85°C), Pb-Free"
U1A U1B U1C U1D U1E U1F U1G U1H: library part ATtiny441-SU, "8-bit AVR Microcontroller, 1.8-5.5V, 2KB Flash, 128 Bytes SRAM, 12 GPIO pins, 14-pin SOIC, Industrial Grade (-40°C to 85°C), Pb-Free"
U2A U2B U2C U2D U2E U2F U2G U2H: "HITAG reader chip"

## Free pads (board coordinates)
  round 1.27 hole 2.794: 1(28.55,129.413) 2(28.556,40.513)

## Via types
v1: diameter 0.6, hole 0.3, Top Layer to Bottom Layer, 214 vias
v2: diameter 0.8, hole 0.6, Top Layer to Bottom Layer, 45 vias
v3: diameter 0.6, hole 0.6, Top Layer to Bottom Layer, 2 vias

## Nets (pads, with @x,y where several pads share a name; then routed paths per layer and width w, separated by ;. In a path a pad name is that pad's centre, name@x,y a point inside that pad or via, vN(x,y) a via of type N, cw(c..) or ccw(c..) an arc to the next point about the centre after c; other vN are vias at no path point)
BV_1: R11.1 SW1.1 U1.10 | length 56.9
  Top Layer w0.152: U1.10@138.895,101.919 138.895,100.563 139.149,100.309 141.96,100.309 153.115,89.154 176.657,89.154 178.187,90.684 SW1.1@178.187,91.186 176.917,92.456 175.006,92.456 174.244,91.694 170.18,91.694 169.714,92.16 R11.1@169.714,93.036
BV_2: R12.1 SW1.2 U1.11 | length 49.5
  Top Layer w0.152: U1.11@139.636,101.919 140.781,101.919 153.165,89.535 168.904,89.535 169.158,89.789 v3(169.926,89.789) 170.053,89.789 v3@170.114,89.85 ; R12.1@172.466,93.036 173.173,93.036 173.609,93.472 173.609,94.228 SW1.2@175.647,96.266
  Bottom Layer w0.152: v3(169.926,89.789) 169.926,90.545 SW1.2@175.647,96.266
BV_3: R13.1 SW1.4 U1.12 | length 56.2
  Top Layer w0.152: U1.12@141.286,103.569 141.286,101.852 152.714,90.424 v3(171.577,90.424) ; R13.1@171.069,93.036 171.069,92.456 171.323,92.202 173.202,92.202 173.914,92.914 173.914,93.65 175.26,94.996 176.917,94.996 SW1.4@178.187,96.266
  Bottom Layer w0.152: v3(171.577,90.424) 171.577,91.313 175.168,94.904 176.825,94.904 SW1.4@178.187,96.266
BV_4: R14.1 SW1.8 U1.13 | length 43.6
  Top Layer w0.152: U1.13@141.286,104.369 142.331,104.369 143,103.7 143,100.652 145.281,98.371 145.429,98.371 147.495,96.305 147.495,96.074 152.383,91.186 168.275,91.186 ; R14.1@168.275,93.036 168.275,91.186 ; SW1.8@175.647,91.186 168.275,91.186
D1: R1.2 U1.20 | length 7.8
  Top Layer w0.152: U1.20@141.286,110.028 146.672,110.028 148.153,108.547 R1.2@148.489,108.547
D2: R2.2 U1.21 | length 7.4
  Top Layer w0.152: U1.21@141.286,110.769 146.914,110.769 147.436,110.247 R2.2@148.489,110.247
D3: R3.2 U1.22 | length 7.4
  Top Layer w0.152: U1.22@141.286,111.569 146.367,111.569 146.745,111.947 R3.2@148.489,111.947
D4: R4.2 U1.23 | length 9
  Top Layer w0.152: U1.23@139.636,113.219 141.54,113.219 141.968,113.647 R4.2@148.489,113.647
D5: R5.2 U1.28 | length 4.5
  Top Layer w0.152: U1.28@135.636,113.219 135.636,113.804 137.6,115.768 R5.2@137.6,116.866
D6: R6.2 U1.29 | length 4.1
  Top Layer w0.152: U1.29@134.836,113.219 134.836,114.736 136,115.9 R6.2@136,116.866
D7: R7.2 U1.32 | length 4.5
  Top Layer w0.152: U1.32@132.377,113.219 132.377,114.216 134.364,116.203 R7.2@134.364,116.866
D8: R8.2 U1.33 | length 4.1
  Top Layer w0.152: U1.33@131.636,113.219 131.636,114.491 132.664,115.519 R8.2@132.664,116.866
D_N: D1.3 J_USB.2 U1.26 | length 50.1
  Top Layer w0.152: U1.26@137.236,113.219 137.236,114.224 137.922,114.91 162.722,114.91 165.694,111.938 169.233,111.938 170.18,110.991 D1.3@170.627,110.991 171.076,110.991 171.643,110.424 171.643,110.043 173.515,108.171 178.529,108.171 178.689,108.331 178.689,110.49 177.35,111.829 J_USB.2@177.35,112.05
D_P: D1.2 J_USB.3 U1.27 | length 43.7
  Top Layer w0.152: U1.27@136.436,113.219 136.436,114.173 137.579,115.316 162.89,115.316 165.862,112.344 169.233,112.344 170.18,113.291 D1.2@170.627,113.291 170.627,112.71 170.942,112.395 174.117,112.395 174.572,112.85 J_USB.3@176.15,112.85
DIN_S1: U1A.12 U2A.9 | length 14
  Top Layer w0.152: U2A.9@121.8,50.36 125.129,50.36 125.6,50.831 125.6,52.695 125.626,52.695 127.626,54.695 130.895,54.695 131.43,55.23 U1A.12@131.43,56.45
DIN_S2: U1B.12 U2B.9 | length 14.1
  Top Layer w0.152: U2B.9@123,77.46 126.06,77.46 126.8,78.2 126.8,80.3 128.295,81.795 132.095,81.795 132.63,82.33 U1B.12@132.63,83.55
DIN_S3: U1C.12 U2C.9 | length 13.9
  Top Layer w0.152: U2C.9@87.3,49.76 90.36,49.76 91.2,50.6 91.2,52.4 92.895,54.095 96.395,54.095 96.93,54.63 U1C.12@96.93,55.85
DIN_S4: U1D.12 U2D.9 | length 14.3
  Top Layer w0.152: U2D.9@51.6,49.26 54.66,49.26 55.4,50 55.4,52.369 56.626,53.595 60.695,53.595 61.23,54.13 U1D.12@61.23,55.35
DIN_S5: U1E.12 U2E.9 | length 14.3
  Top Layer w0.152: U2E.9@52.3,76.66 55.36,76.66 56.1,77.4 56.1,79.869 57.226,80.995 61.395,80.995 61.93,81.53 U1E.12@61.93,82.75
DIN_S6: U1F.12 U2F.9 | length 13.9
  Top Layer w0.152: U2F.9@88,76.36 91.06,76.36 91.79,77.09 91.79,78.821 93.664,80.695 97.095,80.695 97.63,81.23 U1F.12@97.63,82.45
DIN_S7: U1G.12 U2G.9 | length 14
  Top Layer w0.152: U2G.9@87.5,102.76 90.56,102.76 91.3,103.5 91.3,105.5 92.895,107.095 95.326,107.095 95.331,107.1 96.6,107.1 97.13,107.63 U1G.12@97.13,108.85
DIN_S8: U1H.12 U2H.9 | length 14.3
  Top Layer w0.152: U2H.9@53.5,100.86 56.56,100.86 57.4,101.7 57.4,104.1 58.495,105.195 62.595,105.195 63.13,105.73 U1H.12@63.13,106.95
DL2_S1: R6A.1 U1A.5 | length 15
  Top Layer w0.152: R6A.1@126.99,47.2 126.99,48.31 126.514,48.786 126.514,52.114 128.181,53.781 133.519,53.781 133.97,53.33 U1A.5@133.97,51.75
DL2_S2: R6B.1 U1B.5 | length 15.4
  Top Layer w0.152: 127.714,78.41 127.714,76.586 128.19,76.11 R6B.1@128.19,74.3 ; 127.714,78.466 127.714,79.921 128.674,80.881 134.719,80.881 135.17,80.43 U1B.5@135.17,78.85
DL2_S3: R6C.1 U1C.5 | length 15
  Top Layer w0.152: R6C.1@92.49,46.6 92.6,46.71 92.6,49.736 92.114,50.221 92.114,51.614 93.681,53.181 99.019,53.181 99.47,52.73 U1C.5@99.47,51.15
DL2_S4: R6D.1 U1D.5 | length 15.5
  Top Layer w0.152: R6D.1@56.79,46.1 56.79,47.31 56.314,47.786 56.314,51.852 57.143,52.681 63.319,52.681 63.77,52.23 U1D.5@63.77,50.65
DL2_S5: R6E.1 U1E.5 | length 15.6
  Top Layer w0.152: R6E.1@57.49,73.5 57.49,75.41 57.11,75.79 57.11,79.547 57.643,80.081 64.019,80.081 64.47,79.63 U1E.5@64.47,78.05
DL2_S6: R6F.1 U1F.5 | length 15
  Top Layer w0.152: R6F.1@93.19,73.2 93.2,73.21 93.2,75.8 92.8,76.2 92.8,78.3 94.281,79.781 99.719,79.781 100.17,79.33 U1F.5@100.17,77.75
DL2_S7: R6G.1 U1G.5 | length 15
  Top Layer w0.152: R6G.1@92.69,99.6 92.69,101.31 92.31,101.69 92.31,104.779 93.712,106.181 99.219,106.181 99.67,105.73 U1G.5@99.67,104.15
DL2_S8: R6H.1 U1H.5 | length 15.5
  Top Layer w0.152: R6H.1@58.69,97.7 58.679,97.711 58.679,99.321 58.314,99.686 58.314,103.721 58.874,104.281 65.219,104.281 65.67,103.83 U1H.5@65.67,102.25
DOUT_S1: R2A.1 U2A.10 | length 1.7
  Top Layer w0.254: U2A.10@121.8,51.63 123.43,51.63 R2A.1@123.5,51.7
DOUT_S2: R2B.1 U2B.10 | length 2.4
  Top Layer w0.152: U2B.10@123,78.73 123,79.3 123.1,79.4 R2B.1@124.76,79.4
DOUT_S3: R2C.1 U2C.10 | length 2.4
  Top Layer w0.152: U2C.10@87.3,51.03 87.3,51.613 87.387,51.7 R2C.1@89.06,51.7
DOUT_S4: R2D.1 U2D.10 | length 2.4
  Top Layer w0.152: U2D.10@51.6,50.53 51.6,51.092 51.689,51.181 53.341,51.181 R2D.1@53.36,51.2
DOUT_S5: R2E.1 U2E.10 | length 2.4
  Top Layer w0.152: U2E.10@52.3,77.93 52.3,78.462 52.451,78.613 54.047,78.613 R2E.1@54.06,78.6
DOUT_S6: R2F.1 U2F.10 | length 2.3
  Top Layer w0.152: U2F.10@88,77.63 88,78.094 88.206,78.3 R2F.1@89.76,78.3
DOUT_S7: R2G.1 U2G.10 | length 2.3
  Top Layer w0.152: U2G.10@87.5,104.03 87.5,104.518 87.682,104.7 R2G.1@89.26,104.7
DOUT_S8: R2H.1 U2H.10 | length 2.3
  Top Layer w0.152: U2H.10@53.5,102.13 53.5,102.649 53.651,102.8 R2H.1@55.26,102.8
GND: C1.1 C1A.2 C1B.2 C1C.2 C1D.2 C1E.2 C1F.2 C1G.2 C1H.2 C2.2 C2A.1 C2B.1 C2C.1 C2D.1 C2E.1 C2F.1 C2G.1 C2H.1 C3.2 C3A.1 C3B.1 C3C.1 C3D.1 C3E.1 C3F.1 C3G.1 C3H.1 C4.2 C4A.2 C4B.2 C4C.2 C4D.2 C4E.2 C4F.2 C4G.2 C4H.2 C5.2 C6.2 C7.1 C7A.1 C7B.1 C7C.1 C7D.1 C7E.1 C7F.1 C7G.1 C7H.1 C8.1 C8A.1 C8B.1 C8C.1 C8D.1 C8E.1 C8F.1 C8G.1 C8H.1 C9.1 C9A.1 C9B.1 C9C.1 C9D.1 C9E.1 C9F.1 C9G.1 C9H.1 C12.1 D1.1 IC1.2 IC1A.7 IC1A.12 IC1B.7 IC1B.12 IC1C.7 IC1C.12 IC1D.7 IC1D.12 IC1E.7 IC1E.12 IC1F.7 IC1F.12 IC1G.7 IC1G.12 IC1H.7 IC1H.12 J_PD.6 J_ProgA.6 J_ProgB.6 J_ProgC.6 J_ProgD.6 J_ProgE.6 J_ProgF.6 J_ProgG.6 J_ProgH.6 J_USB.4 J_USB.5 J_USB.6 OSC1.2 R3A.2 R3B.2 R3C.2 R3D.2 R3E.2 R3F.2 R3G.2 R3H.2 R10.1 SW1.C1 SW1.C2 U1.8 U1.18 U1.30 U1.38 U1A.14 U1B.14 U1C.14 U1D.14 U1E.14 U1F.14 U1G.14 U1H.14 U2A.1 U2B.1 U2C.1 U2D.1 U2E.1 U2F.1 U2G.1 U2H.1 | length 89.3
  Top Layer w0.508: C3A.1@116.1,45.7 116.1,44.6 117.95,42.75 C4A.2@119.6,42.75 ; R3A.2@123.5,53 123.5,53.6 124,54.1 124.9,54.1 125.4,54.6 C9A.1@125.4,55.4 C8A.1@125.4,57 C7A.1@125.4,58.6 126,58.6 126.79,59.39 128.89,59.39 U1A.14@128.89,56.45 ; v2(125.5,110.7) 125.983,110.217 126.9,110.217 C7.1@126.9,109.104 ; U1.38@129.986,108.369 131.969,108.369 v2(132.2,108.6) ; C1A.2@130.4,44.9 130.65,45.15 C2A.1@134,45.15 v2(134,43.6) ; v2(132.633,99.833) C1.1@134.112,99.833 136.233,99.833 137.236,100.836 U1.8@137.236,101.919 ; U1.30@134.036,113.219 134.036,114.636 v2(134.1,114.7) ; v2(137.67,81.13) IC1B.12@139.7,81.13 ; C2.2@140.561,98.044 140.561,96.539 v2(141.8,95.3) ; U1.18@141.286,108.369 145.731,108.369 146.69,107.41 R10.1@146.69,106.6 148.7,106.6 150.742,104.558 C6.2@154.94,104.558 158.858,104.558 159.351,105.051 IC1.2@161.494,105.051 161.494,106.694 162.352,107.552 v2(168.148,107.552) C3.2@168.148,104.558 ; IC1B.7@145.1,86.21 v2(145.1,87) ; C5.2@160.401,100.341 161.4,100.341 ; IC1.2@161.494,102.751 161.494,100.435 161.4,100.341 ; C4.2@162.687,100.341 161.4,100.341 ; C12.1@164.973,84.163 166.937,84.163 166.952,84.148 OSC1.2@166.952,83.332 ; D1.1@172.327,113.291 172.327,113.927 172.85,114.45 J_USB.5@176.15,114.45
  other v2: 128.9,59.4
IN_N1: C5A.1 C6A.2 J1.1 | length 98.4
  Top Layer w0.152: v1(44.8,61.5) 45.1,61.5 45.329,61.729 45.329,62.719 45.324,62.724 46.4,63.8 76.3,63.8 76.9,63.2 108.1,63.2 109.8,64.9 v1(120.2,64.9) ; C5A.1@120.2,58.5 120.2,59.6 ; v1(120.2,60.7) 120.2,59.6 ; C6A.2@125.3,60.2 125.3,60.8 124.9,61.2 122,61.2 120.4,59.6 120.2,59.6
  Bottom Layer w0.152: J1.1@37.2,61.446 44.746,61.446 v1(44.8,61.5) ; v1(120.2,60.7) v1(120.2,64.9)
IN_N2: C5B.1 C6B.2 J1.3 | length 115.7
  Top Layer w0.152: J1.3@37.2,56.366 37.766,56.366 41.434,60.034 41.6,60.2 41.6,63.3 v1(41,63.9) ; v1(44.8,63.9) 45.495,64.595 76.8,64.595 77.295,64.1 107.965,64.1 113.465,69.6 v1(114.1,69.6) v1@114.3,69.6 ; v1(114.1,71.9) 114.1,72.932 115.468,74.3 115.468,83.077 119.192,86.8 121.4,86.8 ; C5B.1@121.4,85.6 121.4,86.8 ; C6B.2@126.5,87.3 126.5,87.9 126.1,88.3 122.3,88.3 121.4,87.4 121.4,86.8
  Bottom Layer w0.152: v1(41,63.9) v1(44.8,63.9) ; v1@114.1,69.5 v1(114.1,69.6) v1(114.1,71.9)
IN_N3: C5C.1 C6C.2 J2.1 | length 66.4
  Top Layer w0.152: J2.1@37.2,79.446 v1(41.173,75.473) ; v1(44.6,71.2) 44.6,70.7 v1(48.2,67.1) ; v1(52.4,61.7) 53.2,60.9 76,60.9 76.3,60.6 85.7,60.6 ; C5C.1@85.7,57.9 85.7,60.6 ; C6C.2@90.8,59.6 90.8,60.2 90.4,60.6 85.7,60.6
  Bottom Layer w0.152: J2.1@37.2,79.446 J2.1@37.254,79.446 ; v1(41.173,75.473) 44.6,72.046 v1(44.6,71.2) ; v1(48.2,67.1) 52.4,62.9 v1(52.4,61.7)
IN_N4: C5D.1 C6D.2 J2.3 | length 31.1
  Top Layer w0.152: J2.3@37.2,74.366 37.2,70.8 40.8,67.2 v1(41.4,67.2) ; v1(47.1,62.8) 47.1,62.4 49.4,60.1 50,60.1 ; C5D.1@50,57.4 50,60.1 ; C6D.2@55.1,59.1 55.1,59.7 54.7,60.1 50,60.1
  Bottom Layer w0.152: v1(41.4,67.2) 45.192,67.2 47.1,65.292 v1(47.1,62.8)
IN_N5: C5E.1 C6E.2 J3.1 | length 32.6
  Top Layer w0.152: J3.1@37.2,97.446 37.2,97 36,95.8 36,89.5 38.6,86.9 v1(41.6,86.9) ; v1(44.6,86.9) 50.7,86.9 ; C5E.1@50.673,84.773 C5E.1@50.7,84.8 50.7,86.9 ; C6E.2@55.8,86.5 55.8,87.1 55.4,87.5 51.4,87.5 50.8,86.9 50.7,86.9
  Bottom Layer w0.152: J3.1@37.046,97.446 J3.1@37.2,97.446 ; v1(41.6,86.9) v1(44.6,86.9)
IN_N6: C5F.1 C6F.2 J3.3 | length 61.9
  Top Layer w0.152: v1(44.6,89.6) 85.9,89.6 v1(86.4,89.1) ; C5F.1@86.4,84.5 v1(86.4,86.6) 87.1,86.6 87.695,87.195 91.105,87.195 91.5,86.8 C6F.2@91.5,86.2
  Bottom Layer w0.152: J3.3@37.2,91.7 J3.3@37.2,92.366 39.966,89.6 v1(44.6,89.6) ; v1(86.4,86.6) v1(86.4,89.1)
IN_N7: C5G.1 C6G.2 J4.1 | length 58.9
  Top Layer w0.152: J4.1@37.2,115.446 37.954,116.2 83.1,116.2 v1(83.2,116.3) ; C5G.1@85.9,110.9 85.9,111.8 ; 85.9,111.8 v1(85.9,113.5) 90.7,113.5 91,113.2 C6G.2@91,112.6
  Bottom Layer w0.152: v1@83.15,116.25 v1(85.9,113.5) v1@85.7,113.5
IN_N8: C5H.1 C6H.2 J4.3 | length 23.3
  Top Layer w0.152: J4.3@37.2,110.366 51.866,110.366 51.9,110.4 ; C5H.1@51.9,109 51.9,109.9 51.9,110.4 ; C6H.2@57,110.7 57,111.3 56.6,111.7 51.9,111.7 51.9,110.4
IN_P1: J1.4 U2A.4 | length 94
  Top Layer w0.152: J1.4@34.66,58.906 34.906,58.906 36.2,60.2 38.7,60.2 39,60.5 v1(39.1,60.5) ; v1(44.9,60.5) 44.9,60.852 45.633,61.586 45.633,62.433 46.6,63.4 76.269,63.4 76.864,62.805 113.505,62.805 v1(113.8,63.1) ; v1(113.8,60.8) 113.8,54.5 115.4,52.9 U2A.4@116.4,52.9
  Bottom Layer w0.152: J1.4@34.66,58.906 J1.4@34.7,58.866 ; v1(39.1,60.5) v1(44.9,60.5) ; v1(113.8,60.8) v1(113.8,63.1)
IN_P2: J1.2 U2B.4 | length 96.3
  Top Layer w0.152: J1.2@37.2,58.906 39.206,58.906 39.9,59.6 39.9,61.3 v1(41,62.4) ; v1(44.8,62.5) 44.8,62.8 46.2,64.2 76.5,64.2 77,63.7 107.996,63.7 109.596,65.3 109.6,65.3 112.9,68.6 114,68.6 115.3,69.9 v1(115.3,70.5) ; v1(115.1,72.9) 115.2,72.8 115.373,72.8 115.773,73.2 115.773,79.173 116.6,80 U2B.4@117.6,80
  Bottom Layer w0.152: v1(41,62.4) 44.7,62.4 v1(44.8,62.5) ; v1(115.1,72.9) 115.2,72.8 115.2,70.6 v1(115.3,70.5)
IN_P3: J2.4 U2C.4 | length 63
  Top Layer w0.152: J2.4@34.66,76.906 34.894,76.906 36.405,75.395 37.626,75.395 38.921,74.1 38.921,74.079 41.45,71.55 v1(41.45,68.45) ; v1(48.1,62.8) 48.8,62.1 50,62.1 51.505,60.595 75.805,60.595 78.716,57.684 79.408,57.684 79.984,57.108 79.992,57.108 80.3,56.8 80.3,52.3 U2C.4@81.9,52.3
  Bottom Layer w0.152: v1(41.45,68.45) 42.395,67.505 45.318,67.505 48.1,64.723 v1(48.1,62.8)
IN_P4: J2.2 U2D.4 | length 31.2
  Top Layer w0.152: J2.2@37.2,76.906 42.124,71.983 42.124,60.215 41.816,59.908 41.816,59.092 42.3,58.608 42.3,52.5 43,51.8 v2(42.9,51.8) ; v2(44.6,51.8) U2D.4@46.2,51.8
  Bottom Layer w0.152: v2(42.9,51.8) v2(44.6,51.8)
IN_P5: J3.4 U2E.4 | length 23.4
  Top Layer w0.152: J3.4@34.66,94.906 34.66,87.14 41.1,80.7 v2(41.1,80.6) ; v1(45.212,79.121) 46.821,79.121 U2E.4@46.9,79.2
  Bottom Layer w0.152: v2(41.1,80.6) 41.3,80.6 42.779,79.121 v1(45.212,79.121)
IN_P6: J3.2 U2F.4 | length 58.1
  Top Layer w0.152: J3.2@37.2,94.906 39.2,92.906 39.2,91.1 v1(41.6,88.7) ; v1(44.6,88.7) v1(79.6,88.7) ; v1(79.6,85.4) 79.6,80.2 80.9,78.9 U2F.4@82.6,78.9
  Bottom Layer w0.152: J3.2@37.2,94.9 J3.2@37.2,94.906 ; v1(41.6,88.7) v1(44.6,88.7) ; v1(79.6,85.4) v1(79.6,88.7)
IN_P7: J4.4 U2G.4 | length 54.9
  Top Layer w0.152: J4.4@34.66,112.906 35.954,114.2 v1(77.6,114.2) ; v1(80.8,110.9) 80.741,110.841 80.741,105.559 81,105.3 U2G.4@82.1,105.3
  Bottom Layer w0.152: v1(77.6,114.2) 77.6,114.1 v1(80.8,110.9)
IN_P8: J4.2 U2H.4 | length 18.7
  Top Layer w0.152: J4.2@37.2,112.906 37.2,112.9 35.8,111.5 35.8,109.7 42.1,103.4 U2H.4@48.1,103.4
MISO: R1A.1 R1B.1 R1C.1 R1D.1 R1E.1 R1F.1 R1G.1 R1H.1 U1.16 | length 268
  Top Layer w0.152: R1D.1@75.6,58.09 v1(75.6,59.7) ; R1E.1@76.3,85.49 76.3,86.206 76.394,86.3 76.4,86.3 v1(77.4,87.3) 79.379,87.3 79.988,87.91 87.116,87.91 87.316,88.11 91.484,88.11 91.684,87.91 101.29,87.91 102.9,86.3 112,86.3 R1F.1@112,85.19 ; v1(77.4,94.1) v1(77.4,107.1) ; R1H.1@77.5,109.69 77.5,109.9 77.4,110 v1(77.4,111.3) 77.4,112.4 80.105,115.105 108.695,115.105 111.5,112.3 R1G.1@111.5,111.59 112.31,111.59 115.3,108.6 v1(125,108.6) ; v1(77.6,61.7) 78.4,62.5 110.8,62.5 111,62.3 v1(116.1,62.3) ; R1C.1@111.3,58.59 111.3,62.3 ; v1@117.9,60.7 118.1,60.7 119,61.6 143.9,61.6 145.8,59.7 R1A.1@145.8,59.19 147.09,59.19 148.41,60.51 148.41,85.712 147.831,86.29 R1B.1@147,86.29 v1@147,91.4 ; v1(134.453,109.347) 135.053,109.347 137.593,106.807 U1.16@141.248,106.807 ; U1.16@141.286,106.769 142.831,106.769 144.5,105.1 144.5,101.3 147,98.8 v1(147,97.9)
  Bottom Layer w0.152: v1(75.6,59.7) v1(77.6,61.7) ; v1(77.4,87.3) v1(77.4,94.1) ; v1(77.4,107.1) v1(77.4,111.3) ; v1(116.1,62.3) 117.8,60.6 v1(118,60.6) ; v1(125,108.6) 125.8,108.6 126.429,109.229 134.335,109.229 v1(134.453,109.347) ; v1(147,91.7) v1(147,97.9)
MISO_S1: IC1A.5 J_ProgA.4 U1A.8 | length 16
  Top Layer w0.152: U1A.8@136.51,56.45 136.968,56.45 137.668,57.15 139.318,57.15 139.898,56.57 IC1A.5@143.9,56.57
  Bottom Layer w0.152: J_ProgA.4@141,48.5 v1(141,56.6)
MISO_S2: IC1B.5 J_ProgB.4 U1B.8 | length 16.1
  Top Layer w0.152: U1B.8@137.71,83.55 138.15,83.55 138.9,84.3 140.7,84.3 141.33,83.67 IC1B.5@145.1,83.67
  Bottom Layer w0.152: J_ProgB.4@142.2,75.6 v1(142.2,83.7)
MISO_S3: IC1C.5 J_ProgC.4 U1C.8 | length 16.1
  Top Layer w0.152: U1C.8@102.01,55.85 102.459,55.85 103.251,56.642 104.726,56.642 105.398,55.97 IC1C.5@109.4,55.97
  Bottom Layer w0.152: J_ProgC.4@106.5,47.9 v1(106.5,56)
MISO_S4: IC1D.5 J_ProgD.4 U1D.8 | length 16.1
  Top Layer w0.152: U1D.8@66.31,55.35 66.78,55.35 67.564,56.134 69.034,56.134 69.698,55.47 IC1D.5@73.7,55.47
  Bottom Layer w0.152: J_ProgD.4@70.8,47.4 v1(70.8,55.5)
MISO_S5: IC1E.5 J_ProgE.4 U1E.8 | length 16.1
  Top Layer w0.152: U1E.8@67.01,82.75 67.482,82.75 68.298,83.566 69.702,83.566 70.398,82.87 IC1E.5@74.4,82.87
  Bottom Layer w0.152: J_ProgE.4@71.5,74.8 v1(71.5,82.9)
MISO_S6: IC1F.5 J_ProgF.4 U1F.8 | length 16
  Top Layer w0.152: U1F.8@102.71,82.45 103.151,82.45 103.886,83.185 105.664,83.185 106.279,82.57 IC1F.5@110.1,82.57
  Bottom Layer w0.152: J_ProgF.4@107.2,74.5 v1(107.2,82.6)
MISO_S7: IC1G.5 J_ProgG.4 U1G.8 | length 16
  Top Layer w0.152: U1G.8@102.21,108.85 102.859,109.499 105.07,109.499 105.598,108.97 IC1G.5@109.6,108.97
  Bottom Layer w0.152: J_ProgG.4@106.7,100.9 v1(106.7,109)
MISO_S8: IC1H.5 J_ProgH.4 U1H.8 | length 16.1
  Top Layer w0.152: U1H.8@68.21,106.95 68.596,106.95 69.342,107.696 70.972,107.696 71.598,107.07 IC1H.5@75.6,107.07
  Bottom Layer w0.152: J_ProgH.4@72.7,99 v1(72.7,107.1)
MOSI: IC1A.9 IC1B.9 IC1C.9 IC1D.9 IC1E.9 IC1F.9 IC1G.9 IC1H.9 U1.15 | length 331.2
  Top Layer w0.152: v1(66.675,57.277) 67.183,56.769 68.271,56.769 IC1D.9@68.3,56.74 ; v1(67.437,84.074) IC1E.9@68.934,84.074 ; IC1E.9@69,84.14 70.04,84.14 70.7,84.8 76.788,84.8 77.1,85.112 77.1,86 78.095,86.995 79.505,86.995 80.114,87.605 87.243,87.605 87.443,87.805 91.357,87.805 91.557,87.605 99.595,87.605 v1(100.3,86.9) ; IC1H.9@70.2,108.34 73.14,108.34 73.8,109 78.4,109 78.4,112.969 80.231,114.8 103.8,114.8 106.3,112.3 106.3,110.3 ; v1(72.8,61.5) 73.095,61.205 76.126,61.205 76.426,60.905 108.995,60.905 v1(109,60.9) 109,60 106.24,57.24 IC1C.9@104,57.24 ; IC1G.9@104.2,110.24 104.26,110.3 106.3,110.3 ; IC1F.9@104.7,83.84 104.72,83.82 v1(106.299,83.82) 106.919,83.2 111.2,83.2 111.8,82.6 v1(113.2,82.6) ; v1(116.1,59.3) 116.1,59.5 118.505,61.905 143.705,61.905 v1(144.35,62.55) 146.95,62.55 147.786,63.386 147.786,68.8 147.8,68.814 147.8,82.6 146.1,84.3 143.1,84.3 142.5,84.9 IC1B.9@139.74,84.9 ; v1(119.9,87.9) 123.529,91.529 132.7,91.529 132.7,91.522 ; v1(124.8,107.6) 112.6,107.6 110.6,109.6 108.4,109.6 107.7,110.3 106.3,110.3 ; v1(133.8,107.9) 135.731,105.969 U1.15@141.286,105.969 142.531,105.969 143.7,104.8 143.7,100.7 v1(145.5,98.9) ; IC1A.9@138.34,58 IC1A.9@138.5,57.84 138.54,57.8 139.6,57.8 v1(142.5,60.7) ; IC1B.9@139.7,84.94 IC1B.9@139.74,84.9 ; v1(145.5,91.4) 145.5,91.522 132.7,91.522 ; 132.7,91.522 132.7,90.1 137.9,84.9 IC1B.9@139.74,84.9
  Bottom Layer w0.152: v1(66.675,57.277) 68.577,57.277 v1(72.8,61.5) ; v1(100.3,86.9) 101.2,87.8 104,87.8 106.299,85.501 v1(106.299,83.82) ; v1(109,60.9) 110.6,59.3 v1(116.1,59.3) ; v1(113.2,82.6) 114.6,82.6 v1(119.9,87.9) ; v1(124.8,107.6) 131.852,107.6 132.081,107.829 133.771,107.829 133.8,107.857 v1(133.8,107.9) ; v1(142.5,60.7) v1(144.35,62.55) ; v1(145.5,91.4) v1(145.5,98.9)
MOSI_S1: IC1A.8 J_ProgA.1 U1A.7 | length 16.6
  Top Layer w0.152: v1(136.5,53.8) 136.51,53.79 U1A.7@136.51,51.75 136.51,49.39 v1@136.6,49.3 ; v1(136.5,59) 138.39,59 IC1A.8@138.5,59.11
  Bottom Layer w0.152: v1(136.5,53.8) v1(136.5,59) ; v1@136.6,49.403 136.525,49.328 136.525,46.975 137.54,45.96 J_ProgA.1@138.46,45.96
  other v1: 136.525,49.403
MOSI_S2: IC1B.8 J_ProgB.1 U1B.7 | length 17.7
  Top Layer w0.152: v1(136.5,81.3) 137.71,80.09 U1B.7@137.71,78.85 v1(137.71,76.49) v1@137.8,76.4 ; v1(137.6,86.2) 137.61,86.21 IC1B.8@139.7,86.21
  Bottom Layer w0.152: v1(136.5,81.3) 136.5,85.1 v1(137.6,86.2) ; v1(137.71,76.49) 137.71,74.09 138.74,73.06 J_ProgB.1@139.66,73.06
MOSI_S3: IC1C.8 J_ProgC.1 U1C.7 | length 16.3
  Top Layer w0.152: v1(102.01,49.022) U1C.7@102.01,51.15 v1(102.01,53.19) ; v1(102.3,58.5) 103.99,58.5 IC1C.8@104,58.51
  Bottom Layer w0.152: v1(102.01,49.022) 102.01,46.39 103.04,45.36 J_ProgC.1@103.96,45.36 ; v1(102.01,53.19) 102.01,58.21 v1(102.3,58.5)
MOSI_S4: IC1D.8 J_ProgD.1 U1D.7 | length 18.2
  Top Layer w0.152: v1(66.294,48.408) 66.294,50.634 U1D.7@66.31,50.65 66.31,51.89 64.4,53.8 64.4,56.4 66.01,58.01 IC1D.8@68.3,58.01
  Bottom Layer w0.152: 66.294,45.906 67.34,44.86 J_ProgD.1@68.26,44.86 ; 66.294,45.945 v1@66.294,48.387